# Altium PCB E-18 Ultrasonic.PcbDoc
Units mil, origin at the board's own origin, x right, y up, seen from the top; angles counter-clockwise.
Board outline 837 x 796.31 mil, 2 copper layers (Top Layer, Bottom Layer); 11 components, 11 nets, 42 pads, 5 vias.
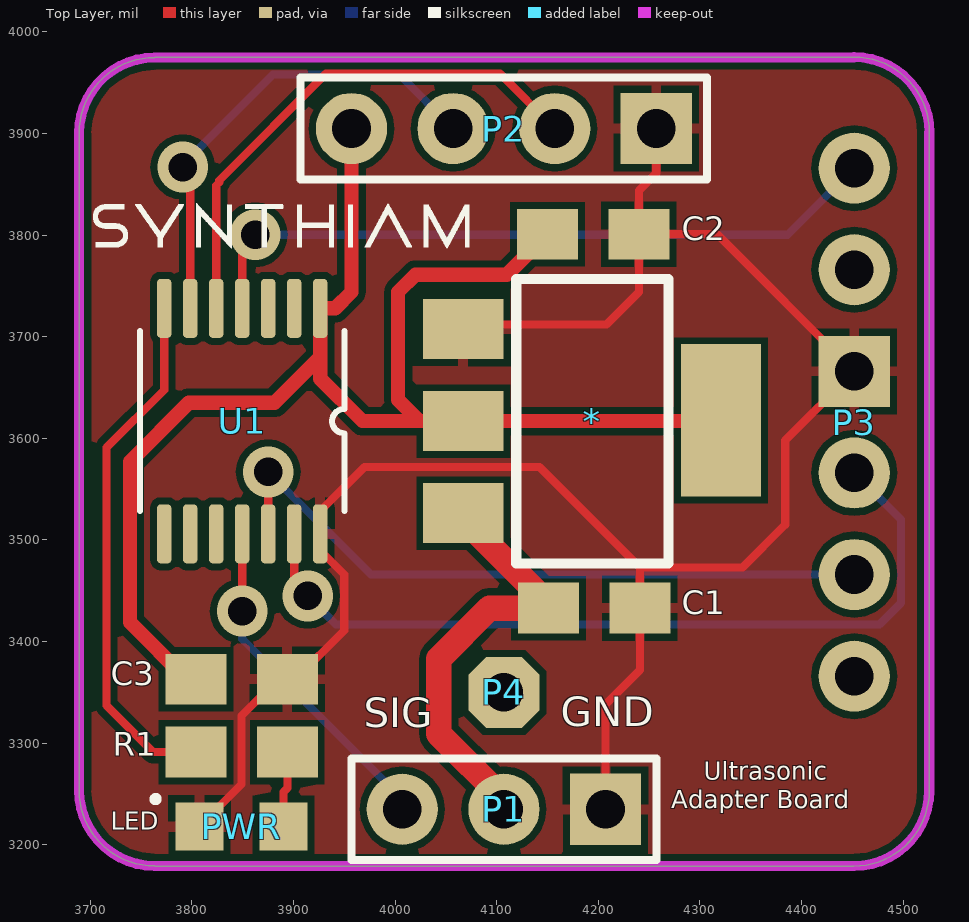
[diagram p0: Top Layer view]
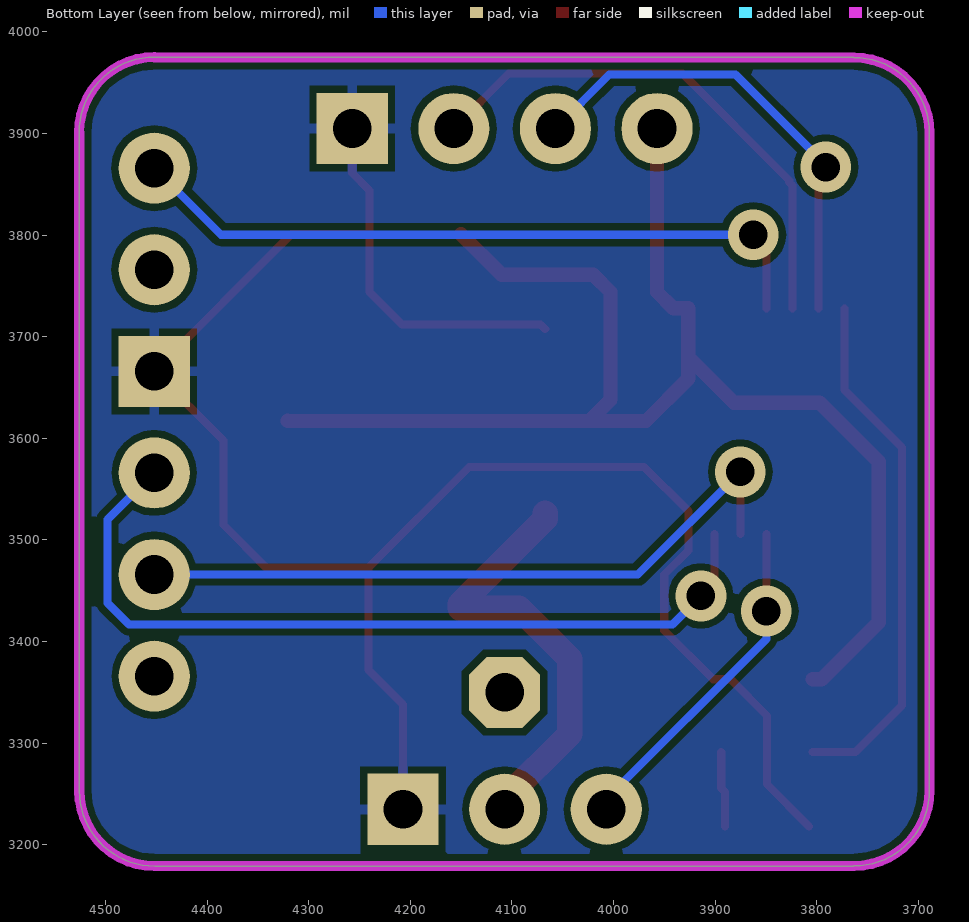
[diagram p1: Bottom Layer view, seen from below]

## Layer stack, top to bottom
Top Layer: signal copper 1.4
Dielectric: dielectric 12.6, FR-4, Dk 4.8
Bottom Layer: signal copper 1.4

## Board outline
3689,3253.5 ccw(c3763.31,3253.5) 3763.31,3179.19 3763.31,3179 4451.5,3179 ccw(c4451.5,3253.31) 4525.81,3253.31 4525.81,3901 4526,3901 ccw(c4451.69,3901) 4451.69,3975.31 4451.69,3975 3763.31,3975 3763.31,3974.81 ccw(c3763.31,3900.5) 3689,3900.5

## Design rules (kind name [scope] priority, off if disabled: settings)
Clearance [All] p1: gap=7
PolygonConnect [All] p1: connectstyle=Relief reliefconductorwidth=10 reliefentries=4 polygonreliefangle="90 Angle"
RoutingVias [All] p1: holewidth=28 width=50 viastyle="Through Hole" minholewidth=28 minwidth=50 maxholewidth=28 maxwidth=50
SMDNeckDown [All] p1: percent=105.000
SilkscreenOverComponentPads [All] p1: minsilkscreentomaskgap=10
SolderMaskExpansion [All] p1: expansion=4
Width Width_2 [InNet('VCC')] p1: maxlimit=30 minlimit=10 preferedwidth=14 minimp=50.000000 maximp=50.000000 favimp=50.000000
Width Width_1 [InNet('VIN')] p2: maxlimit=50 minlimit=10 preferedwidth=25 minimp=50.000000 maximp=50.000000 favimp=50.000000
Width [All] p3: maxlimit=10 minlimit=7 preferedwidth=8 minimp=50.000000 maximp=50.000000 favimp=50.000000
27 further rules are at their usual default settings.

## Components (designator, comment, footprint, x,y, rotation, side; value= is the part's Value field where it differs from the comment)
* "VREG1117" VREG1117 4194,3617 r270 top
C1 "Cap" 0805 4151,3433 r0 top
C2 "Cap" 0805 4150,3801 r0 top
C3 "18pF" "0805 TIGHT" 3849,3363 r180 top
P1 "SIGNAL HEADER" HDR1X3 4007.13,3235 r0 top
P2 "HC-SR04 HEADER" HDR1X4 3957.13,3905 r0 top
P3 "PROGRAMMING HEADER" HDR1X6 4452,3866 r270 top
P4 "Plug" PIN1 4635.13,3299 r0 top
PWR "LED" "0805 LED - TIGHT" 3821.24,3218 r180 top (schematic designator PWRLED)
R1 "Res1" "0805 TIGHT" 3849,3291.19 r180 top (schematic designator R6)
U1 "PIC16F1704 - Ultrasonic" TSSOP14 3848,3616.13 r270 top

## Footprints (in the part's own frame and the unit in brackets; to place one, negate y for a bottom-side part, rotate by r counter-clockwise, add the part's x,y. Pads: shape width x height; smd on the part's side, far side on the other; paste and mask are expansions set on the pad)
0805 [mil]
  rect 60x50 smd: 1(0,0) 2(90,0)
"0805 LED - TIGHT" [mm] "SMT LED; 2 Flat Leads; Lite-Oon LTST-C170CKT"
  rect 1.2x1.2 smd: 1(-1.75,0) 2(0.35,0)
  silkscreen extent 1.42,-0.71 1.47,-0.66
"0805 TIGHT" [mil]
  rect 60x50 smd: 1(-45,0) 2(45,0)
HDR1X3 [mil] "Connector; Header; 3 Position"
  round 70 hole 38: 1(0,0) 2(100,0)
  rect 70x70 hole 38: 3(200,0)
  silkscreen extent -50,-50 250,50
HDR1X4 [mil] "Connector; Header; 4 Position"
  round 70 hole 38: 1(0,0) 2(100,0) 3(200,0)
  rect 70x70 hole 38: 4(300,0)
  silkscreen extent -50,-50 350,50
HDR1X6 [mil] "Connector; Header; 6 Position"
  round 70 hole 38: 1(0,0) 2(100,0) 4(300,0) 5(400,0) 6(500,0)
  rect 70x70 hole 38: 3(200,0)
PIN1 [mil] "Connector; Plug"
  oct 70x70 hole 38: 1(-528,51)
TSSOP14 [mil] "PIC16F1503"
  rrect50% 58x14 smd mask+4: 1(-111.87,78.35) 2(-111.87,52.76) 3(-111.87,27.17) 4(-111.87,1.57) 5(-111.87,-24.02) 6(-111.87,-49.61) 7(-111.87,-75.2) 8(110.13,-75.2) 9(110.13,-49.61) 10(110.13,-24.02) 11(110.13,1.57) 12(110.13,27.17) 13(110.13,52.76) 14(110.13,78.35)
  silkscreen extent -89,-99 88,102
VREG1117 [mil]
  rect 59x79 smd: 1(-90.55,-126.77) 2(0,-126.77) 3(90.55,-126.77)
  rect 150x79 smd: 2(-0.67,126.77)
  silkscreen extent -140,-75 140,75

## Part data
C1 C2: "Capacitor"
C3: library part Cap, "Capacitor"
P1: library part "Header 3", "Header, 3-Pin"
P2: library part "Header 4", "Header, 4-Pin"
P3: library part "Header 6", "Header, 6-Pin"
PWR: library part LED1, "Typical RED GaAs LED"
R1: "Resistor"

## Via types
v1: diameter 50, hole 28, Top Layer to Bottom Layer, tented both sides, 5 vias

## Nets (pads, with @x,y where several pads share a name; then routed paths per layer and width w, separated by ;. In a path a pad name is that pad's centre, name@x,y a point inside that pad or via, vN(x,y) a via of type N, cw(c..) or ccw(c..) an arc to the next point about the centre after c; other vN are vias at no path point)
ECHO: P2.3 U1.5 | length 523.2
  Top Layer w8: U1.5 3823.98,3849.07 3827,3852.09 3827,3854 3932,3959 4103.13,3959 P2.3
GND: *.1 C1.2 C2.2 C3.1 P1.3 P2.4 P3.3 PWR.2 U1.14 | length 1968.4
  Top Layer w8: PWR.2 3849,3259.54 3849,3327 3885,3363 C3.1 3902,3363 3950,3411 3950,3466 3926.35,3489.65 U1.14 3926.35,3528.35 3970,3572 4142,3572 4241,3473 ; *.1 4071.68,3712 4208,3712 4240,3744 C2.2 ; P1.3@4207.13,3245 4207.13,3338 4241,3371.87 C1.2 4241,3473 ; P2.4 4257.13,3861.13 4240,3844 C2.2 ; C2.2 4317,3801 P3.3 4384,3598 4384,3515 4342,3473 4241,3473
LED: R1.2 U1.7 | length 521.5
  Top Layer w8: U1.7 3772.8,3647.8 3716,3591 3716,3337 3761.81,3291.19 R1.2
MCLR: P3.1 U1.4 | length 694.5
  Top Layer w8: U1.4 3849.57,3787.57 v1(3862.39,3800.39)
  Bottom Layer w8: v1(3862.39,3800.39) 4386.39,3800.39 P3.1
NetPWR_1: PWR.1 R1.1 | length 74.8
  Top Layer w8: PWR.1 3890.14,3252 3894,3255.86 R1.1
OUT: P1.1 U1.11 | length 326.3
  Top Layer w8: v1(3849.57,3430) U1.11
  Bottom Layer w8: v1(3849.57,3430) 3849.57,3402.56 P1.1@4007.13,3245
PGC: P3.5 U1.12 | length 679.7
  Top Layer w8: U1.12 v1(3875.17,3567)
  Bottom Layer w8: v1(3875.17,3567) 3976.17,3466 P3.5
PGD: P3.4 U1.13 | length 817.8
  Top Layer w8: U1.13 3900.76,3458.24 v1(3914,3445)
  Bottom Layer w8: v1(3914,3445) 3942,3417 4477,3417 4498,3438 4498,3520 P3.4
TRIG: P2.2 U1.6 | length 480.1
  Top Layer w8: v1(3791,3867) 3789,3867 3782.39,3860.39 3798.39,3844.39 U1.6
  Bottom Layer w8: v1(3791,3867) 3789,3867 3880,3958 4004.13,3958 P2.2
VCC: *.2 C2.1 C3.2 P2.1 U1.1 | length 1462.6
  Top Layer w14: C3.2 3795,3363 3739,3419 3739,3577 3797,3635 3881.35,3635 3926.35,3680 ; P2.1 3957.13,3744 3941.13,3728 U1.1 3926.35,3680 ; C2.1 4110,3761 4020,3761 4003,3744 4003,3638 4024,3617 ; *.2@4320.77,3617.67 4320.77,3617 4067.23,3617 4024,3617 ; 3926.35,3680 3926.35,3658.65 3968,3617 4024,3617
VIN: *.3 C1.1 P1.2 | length 421.4
  Top Layer w25: *.3 4067.23,3520.77 4151,3437 C1.1 4093,3433 4043,3383 4043,3309.13 P1.2@4107.13,3245
pads on no net: P3.2 P3.6 P4.1 U1.2 U1.3 U1.8 U1.9 U1.10

## Polygon pours and split planes (outlines as drawn)
GND on Bottom Layer "BTM Layer-No Net" (solid, pour order 4): 3689,3253.5 ccw(c3763.31,3253.5) 3763.31,3179.19 3763.31,3179 4451.5,3179 ccw(c4451.5,3253.31) 4525.81,3253.31 4525.81,3901 4526,3901 ccw(c4451.69,3901) 4451.69,3975.31 4451.69,3975 3763.31,3975 3763.31,3974.81 ccw(c3763.31,3900.5) 3689,3900.5
GND on Top Layer "Top Layer-No Net" (solid, pour order 2): 3689,3253.5 ccw(c3763.31,3253.5) 3763.31,3179.19 3763.31,3179 4451.5,3179 ccw(c4451.5,3253.31) 4525.81,3253.31 4525.81,3901 4526,3901 ccw(c4451.69,3901) 4451.69,3975.31 4451.69,3975 3763.31,3975 3763.31,3974.81 ccw(c3763.31,3900.5) 3689,3900.5

## Keep-outs
Keep-Out Layer:
  lines w10: 3763.31,3179 4451.5,3179 ccw(c4451.5,3253.31) 4525.81,3253.31 4525.81,3901 ; 3763.31,3179.19 cw(c3763.31,3253.5) 3689,3253.5 3689,3900.5 cw(c3763.31,3900.5) 3763.31,3974.81 ; 3763.31,3975 4451.69,3975 ; 4451.69,3975.31 cw(c4451.69,3901) 4526,3901

## Silkscreen, mask and mechanical layers (free items; w line width, h text height)
Top Overlay:
  drawing of 2260 lines, arcs and shapes, not listed
  text "GND" at 4163,3307 h50
  text "SIG" at 3969,3306 h50
  text "Ultrasonic" at 4304,3258 h30
  text "Adapter Board" at 4272,3230 h30
Bottom Solder:
  text ":)" at 4390,3273 h150 r270